# Altium PCB nixie_pcb.PcbDoc
Units mm, origin at the board's own origin, x right, y up, seen from the top; angles counter-clockwise.
Board outline 85 x 41 mm, 2 copper layers (Top Layer, Bottom Layer); 50 components, 56 nets, 228 pads, 25 vias.
Unrouted connection lines stored in the file: 1.
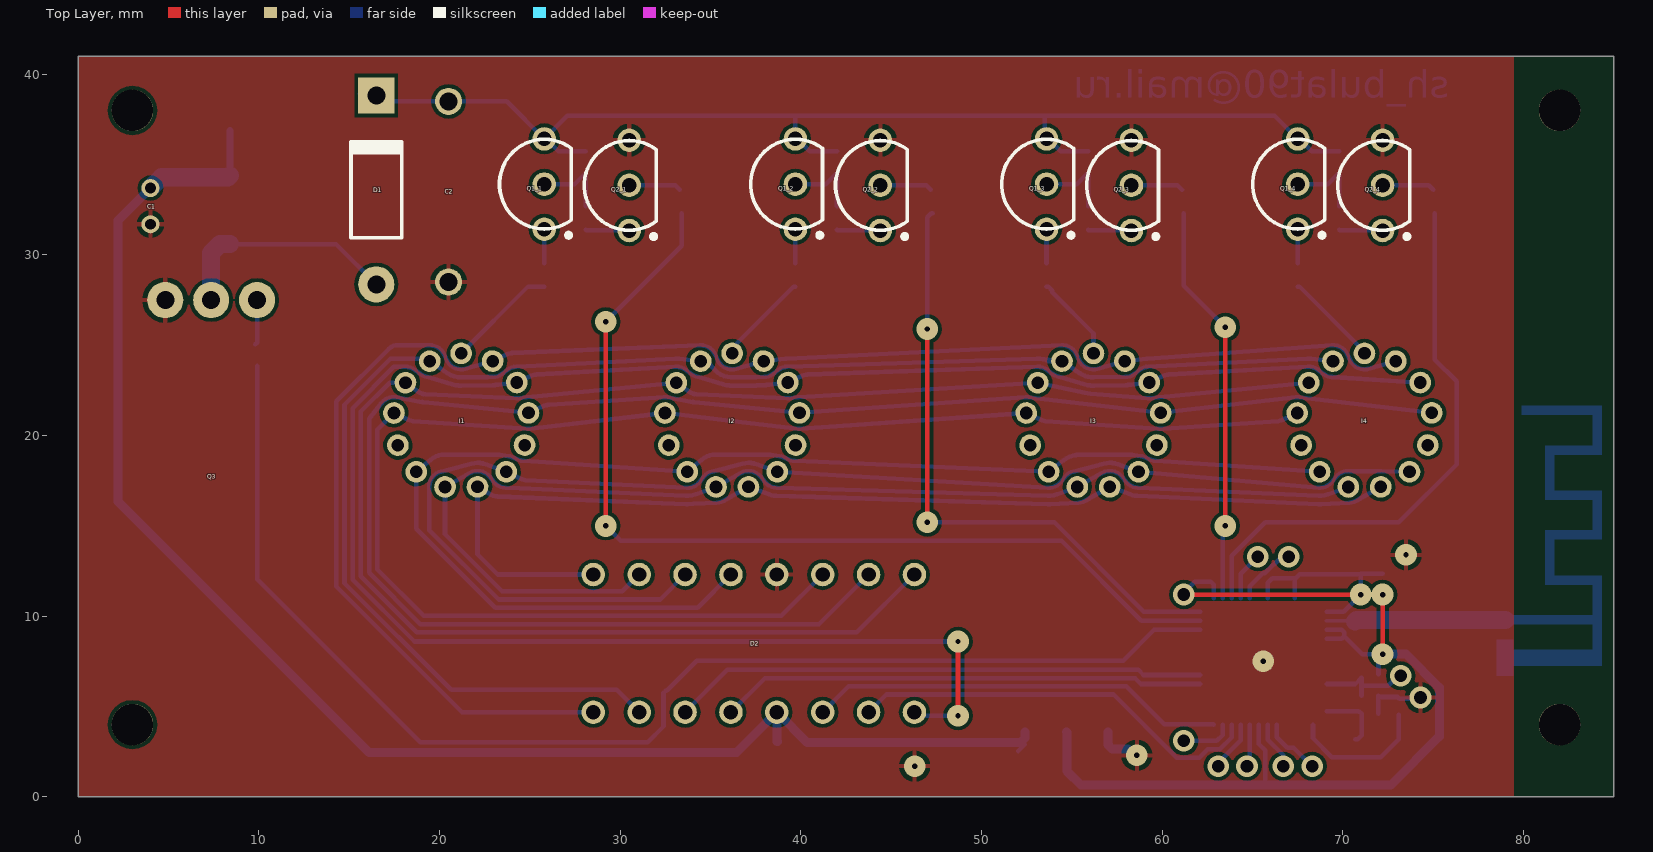
[diagram p0: Top Layer view]
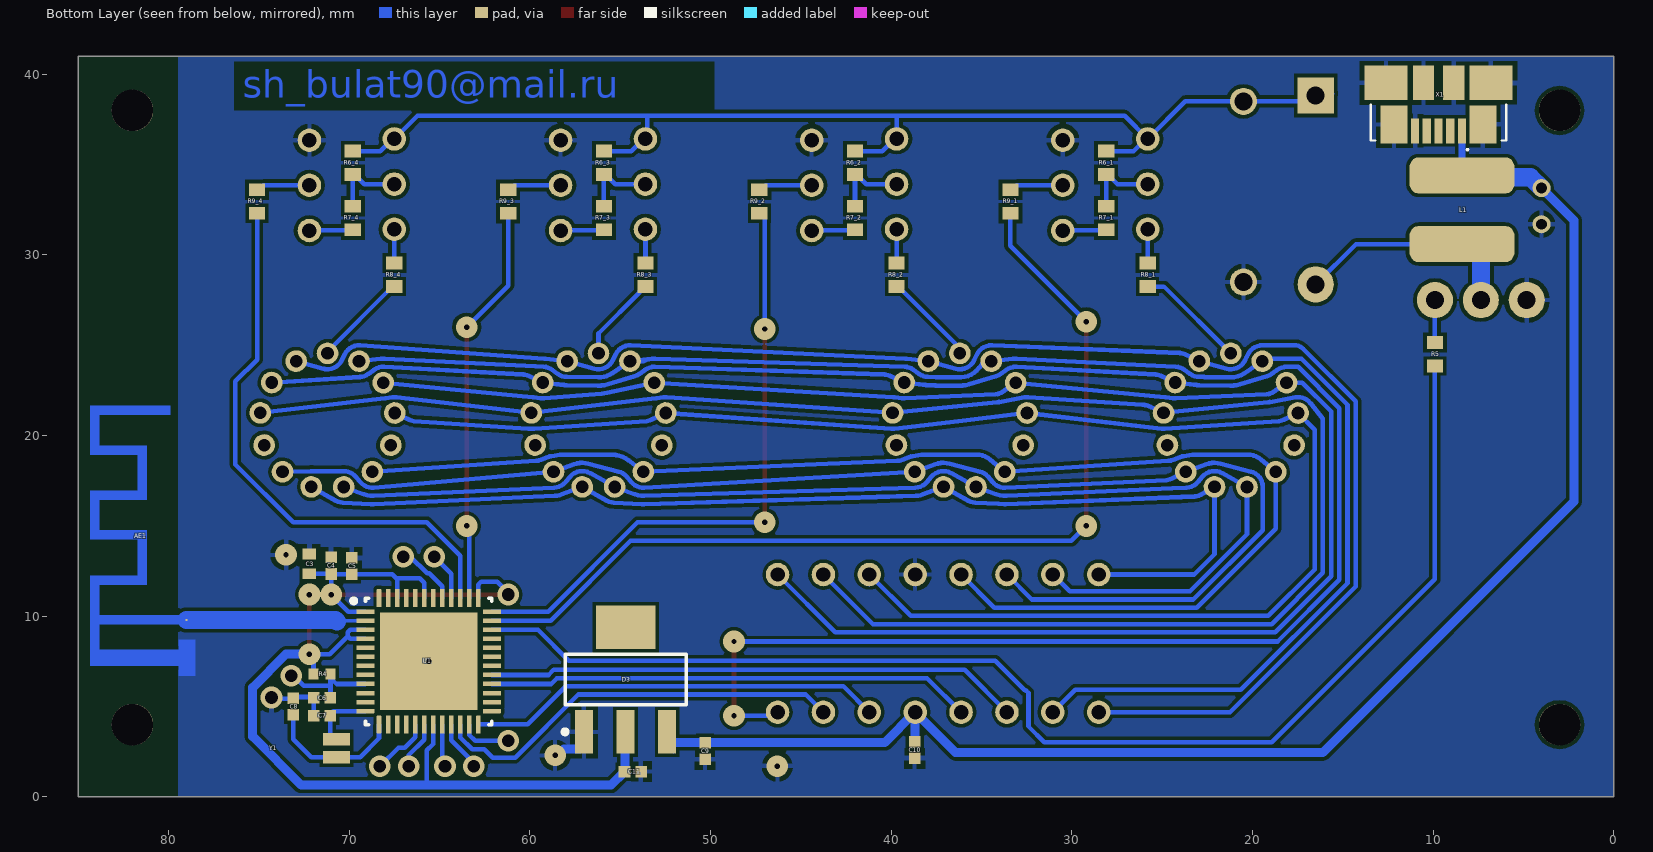
[diagram p1: Bottom Layer view, seen from below]

## Layer stack, top to bottom
Top Solder: solder mask 0.0102, Solder Resist, Dk 3.5
Top Layer: signal copper 0.0356
Dielectric 1: dielectric 0.32, FR-4, Dk 4.8
Bottom Layer: signal copper 0.0356
Bottom Solder: solder mask 0.0102, Solder Resist, Dk 3.5

## Board outline
0,0 85,0 85,41 0,41

## Design rules (kind name [scope] priority, off if disabled: settings)
Clearance [All] p1: gap=0.2 ignorepadtopadclearanceinfootprint=FALSE except(0: Arc-Hole Track-Hole SMDPad-Hole THPad-Hole Via-Hole Fill-Hole Poly-Hole Region-Hole Text-Hole; 0.15: Arc-THPad Track-THPad)
Height [All] p1: minheight=0 maxheight=40 prefheight=12.7
PolygonConnect PolygonConnect_1 [isvia] p1 off: connectstyle=Direct reliefconductorwidth=0.254 reliefentries=4 polygonreliefangle="90 Angle" airgapwidth=0.254
PolygonConnect [All] p2: connectstyle=Relief reliefconductorwidth=0.254 reliefentries=4 polygonreliefangle="90 Angle" airgapwidth=0.254
RoomDefinition HSSW4 [InComponentClass('HSSW4')] p1: confinementstyle=ConfineIn formatcopy=TRUE lockcomponents=FALSE outline 64.6,27 76.5,27 76.5,37.5 64.6,37.5
RoomDefinition HSSW3 [InComponentClass('HSSW3')] p2: confinementstyle=ConfineIn formatcopy=TRUE lockcomponents=FALSE outline 50.7,27 62.6,27 62.6,37.5 50.7,37.5
RoomDefinition HSSW2 [InComponentClass('HSSW2')] p3: confinementstyle=ConfineIn formatcopy=TRUE lockcomponents=FALSE outline 36.8,27 48.7,27 48.7,37.5 36.8,37.5
RoomDefinition HSSW1 [InComponentClass('HSSW1')] p4: confinementstyle=ConfineIn formatcopy=TRUE lockcomponents=FALSE outline 22.9,27 34.8,27 34.8,37.5 22.9,37.5
RoutingVias [All] p1: holewidth=0.711 width=1.27 viastyle="Through Hole" minholewidth=0.5 minwidth=1 maxholewidth=0.711 maxwidth=1.27
ShortCircuit [InComponent('AE1') vs IsFill] p1: allowed=TRUE
SolderMaskExpansion [All] p1: expansion=0.102 istentingtop=FALSE
Width [All] p1: maxlimit=1 minlimit=0.2 preferedwidth=0.254
28 further rules are at their usual default settings.

## Classes and differential pairs
net class A[1..4]: A1 A2 A3 A4
channel class high_side_switch: HSSW1 HSSW2 HSSW3 HSSW4
net class CTRL[1..4]: CTRL1 CTRL2 CTRL3 CTRL4
component class HSSW4: Q1_4 Q2_4 R6_4 R7_4 R8_4 R9_4
component class HSSW3: Q1_3 Q2_3 R6_3 R7_3 R8_3 R9_3
component class HSSW2: Q1_2 Q2_2 R6_2 R7_2 R8_2 R9_2
component class HSSW1: Q1_1 Q2_1 R6_1 R7_1 R8_1 R9_1
component class Designator: C1 C2 D1 L1 Q3 R5 X1

## Components (designator, comment, footprint, x,y, rotation, side; value= is the part's Value field where it differs from the comment)
AE1 "Antenna 2.4GHz" "Antenna 2.4Ghz" 78.95,7.25 r90 bottom
C1 "Cap Pol2" CAP_POL_5*11 4,32.7 r270 top value=100u
C2 "JFA02E104J" FILM_CAP_10 20.5,33.5 r90 top value=10nF
C3 "F980J476MMA" cap_tant_0603 72.2,12.9 r90 bottom value=47u
C4 "" "cap 0402" 71,12.8 r90 bottom value=10u
C5 "" "cap 0402" 69.851,12.779 r90 bottom value=0.1u
C6 "" "cap 0402" 71.5,5.5 r0 bottom value=0.1u
C7 "" "cap 0402" 71.5,4.5 r0 bottom value=10u
C8 "" "cap 0402" 73.1,5 r90 bottom value=10u
C9 "" "cap 0402" 50.3,2.54 r270 bottom value=0.1u
C10 "" "cap 0402" 38.7,2.6 r270 bottom value=0.1u
C11 "" "cap 0402" 54.3,1.4 r180 bottom value=0.1u
D1 "HER104" DO-204AL 16.5,33.6 r90 top
D2 "K155ID1" DIP16 37.4,8.5 r0 top
D3 "LD1117S33TR" SOT223_N 54.7,6.5 r90 bottom
I1 "IN-16" IN-16 21.2,20.8 r0 top
I2 "IN-16" IN-16 36.2,20.8 r0 top
I3 "IN-16" IN-16 56.2,20.8 r0 top
I4 "IN-16" IN-16 71.2,20.8 r0 top
L1 "Inductor" SDR0604 8.4,32.5 r180 bottom value=100u
Q1_1 "MPSA92" "TO-92 bent leads" 25.8,33.92 r0 top (schematic designator Q1)
Q1_2 "MPSA92" "TO-92 bent leads" 39.7,33.92 r0 top (schematic designator Q1)
Q1_3 "MPSA92" "TO-92 bent leads" 53.6,33.92 r0 top (schematic designator Q1)
Q1_4 "MPSA92" "TO-92 bent leads" 67.5,33.92 r0 top (schematic designator Q1)
Q2_1 "MPSA42" "TO-92 bent leads" 30.5,33.85 r0 top (schematic designator Q2)
Q2_2 "MPSA42" "TO-92 bent leads" 44.4,33.85 r0 top (schematic designator Q2)
Q2_3 "MPSA42" "TO-92 bent leads" 58.3,33.85 r0 top (schematic designator Q2)
Q2_4 "MPSA42" "TO-92 bent leads" 72.2,33.85 r0 top (schematic designator Q2)
Q3 "IRL640" TO220_LYING 7.36,27.5 r180 top
R4 "" "res 0402" 71.5,6.8 r180 bottom value=10k
R5 "Res2" 0402_res 9.9,24.5 r90 bottom value=100
R6_1 "Res2" 0402_res 28.1,35.1 r90 bottom value=10k (schematic designator R6)
R6_2 "Res2" 0402_res 42,35.1 r90 bottom value=10k (schematic designator R6)
R6_3 "Res2" 0402_res 55.9,35.1 r90 bottom value=10k (schematic designator R6)
R6_4 "Res2" 0402_res 69.8,35.1 r90 bottom value=10k (schematic designator R6)
R7_1 "Res2" 0402_res 28.1,32.05 r90 bottom value=10K (schematic designator R7)
R7_2 "Res2" 0402_res 42,32.05 r90 bottom value=10K (schematic designator R7)
R7_3 "Res2" 0402_res 55.9,32.05 r90 bottom value=10K (schematic designator R7)
R7_4 "Res2" 0402_res 69.8,32.05 r90 bottom value=10K (schematic designator R7)
R8_1 "Res2" 0402_res 25.8,28.9 r90 bottom value=10K (schematic designator R8)
R8_2 "Res2" 0402_res 39.7,28.9 r90 bottom value=10K (schematic designator R8)
R8_3 "Res2" 0402_res 53.6,28.9 r90 bottom value=10K (schematic designator R8)
R8_4 "Res2" 0402_res 67.5,28.9 r90 bottom value=10K (schematic designator R8)
R9_1 "Res2" 0402_res 33.4,32.95 r270 bottom value=10K (schematic designator R9)
R9_2 "Res2" 0402_res 47.3,32.95 r270 bottom value=10K (schematic designator R9)
R9_3 "Res2" 0402_res 61.2,32.95 r270 bottom value=10K (schematic designator R9)
R9_4 "Res2" 0402_res 75.1,32.95 r270 bottom value=10K (schematic designator R9)
U1 "ESP32-PICO-D4" ESP32-PICO-D4_Round_corner_pads 65.6,7.5 r180 bottom
X1 "47346-0001" MOLEX_47346-0001 9.7,38.2 r0 bottom
Y1 "XTAL" 32.768khz_quartz 70.7,2.7 r90 bottom

## Footprints (in the part's own frame and the unit in brackets; to place one, negate y for a bottom-side part, rotate by r counter-clockwise, add the part's x,y. Pads: shape width x height; smd on the part's side, far side on the other; paste and mask are expansions set on the pad)
32.768khz_quartz [mm]
  rect 0.7x1.5 smd: 1(-0.5,0) 2(0.5,0)
  body extent -0.99,2 1,8, height 2
0402_res [mm]
  rect 0.7x0.9 smd: 1(-0.65,0) 2(0.65,0)
  body extent -0.5,-0.25 0.5,0.25, height 0.4
"Antenna 2.4Ghz" [mm]
  rect 0.1x0.1 smd paste+0: 1(2.55,0.05)
  Top Layer region: 0,0 0,5.39 5,5.39 5,2.75 7,2.75 7,5.39 9.7,5.39 9.7,2.75 11.7,2.75 11.7,5.39 14.4,5.39 14.4,0.95 13.9,0.95 13.9,4.89 12.2,4.89 12.2,2.25 9.2,2.25 9.2,4.89 7.5,4.89 7.5,2.25 4.5,2.25 4.5,4.89 2.8,4.89 2.8,0 2.3,0 2.3,4.89 0.9,4.89 0.9,0
"cap 0402" [mm] "Chip Capacitor, 2-Leads, Body 1.00x0.50mm, IPC Medium Density"
  rect 0.64x0.64 smd: 1(-0.46,0) 2(0.46,0)
  body extent -0.55,-0.3 0.55,0.3, height 0.6
CAP_POL_5*11 [mm]
  round 1 hole 0.6: 1(-1,0) 2(1,0)
  body extent -2.5,-2.5 2.5,2.5, height 11
cap_tant_0603 [mm] "cap_0603"
  rect 0.6x0.75 smd: 1(-0.55,0) 2(0.55,0)
  body extent -0.8,-0.43 0.8,0.42, height 0.8
DIP16 [mm]
  round 1.3 hole 0.8: 1(-8.89,-3.81) 2(-6.35,-3.81) 3(-3.81,-3.81) 4(-1.27,-3.81) 5(1.27,-3.81) 6(3.81,-3.81) 7(6.35,-3.81) 8(8.89,-3.81) 9(8.89,3.81) 10(6.35,3.81) 11(3.81,3.81) 12(1.27,3.81) 13(-1.27,3.81) 14(-3.81,3.81) 15(-6.35,3.81) 16(-8.89,3.81)
  body extent -9.98,-3.94 9.98,3.94, height 4.7
DO-204AL [mm] "Diode, Axial; Body 5.2 x 2.7 mm (LxDia. max), Lead Dia. 0.86 mm (max)"
  round 2 hole 1: 1(-5.23,0)
  rect 2x2 hole 1: 2(5.23,0)
  silkscreen extent -2.65,-1.4 2.75,1.4
ESP32-PICO-D4_Round_corner_pads [mm]
  rrect25% 1x0.25 smd: 1(-3.5,2.75) 12(-3.5,-2.75) 25(3.5,-2.75) 36(3.5,2.75)
  rect 1x0.25 smd: 2(-3.5,2.25) 3(-3.5,1.75) 4(-3.5,1.25) 5(-3.5,0.75) 6(-3.5,0.25) 7(-3.5,-0.25) 8(-3.5,-0.75) 9(-3.5,-1.25) 10(-3.5,-1.75) 11(-3.5,-2.25) 26(3.5,-2.25) 27(3.5,-1.75) 28(3.5,-1.25) 29(3.5,-0.75) 30(3.5,-0.25) 31(3.5,0.25) 32(3.5,0.75) 33(3.5,1.25) 34(3.5,1.75) 35(3.5,2.25)
  rrect25% 0.25x1 smd: 13(-2.75,-3.5) 24(2.75,-3.5) 37(2.75,3.5) 48(-2.75,3.5)
  rect 0.25x1 smd: 14(-2.25,-3.5) 15(-1.75,-3.5) 16(-1.25,-3.5) 17(-0.75,-3.5) 18(-0.25,-3.5) 19(0.25,-3.5) 20(0.75,-3.5) 21(1.25,-3.5) 22(1.75,-3.5) 23(2.25,-3.5) 38(2.25,3.5) 39(1.75,3.5) 40(1.25,3.5) 41(0.75,3.5) 42(0.25,3.5) 43(-0.25,3.5) 44(-0.75,3.5) 45(-1.25,3.5) 46(-1.75,3.5) 47(-2.25,3.5)
  rect 5.4x5.4 smd paste-10: 49(0,0)
  silkscreen extent -4.28,-3.5 3.5,3.5, body extent -3.5,-3.5 3.5,3.5, height 1
FILM_CAP_10 [mm]
  round 1.5 hole 1: 1(-5,0) 2(5,0)
IN-16 [mm]
  round 1.2 hole 0.7: 1(0,3.75) 2(-1.743,3.32) 3(-3.087,2.129) 4(-3.723,0.451) 5(-3.506,-1.332) 6(-2.485,-2.809) 7(-0.894,-3.642) 8(0.901,-3.64) 9(2.49,-2.804) 10(3.508,-1.326) 11(3.722,0.457) 12(3.083,2.135) 13(1.737,3.323)
  body extent -3.75,-3.75 3.75,3.75, height 40
MOLEX_47346-0001 [mm]
  rect 0.45x1.38 smd: 1(-1.3,1.33) 2(-0.65,1.33) 3(0,1.33) 4(0.65,1.33) 5(1.3,1.33)
  rect 2.375x1.9 smd: 5(-2.913,-1.33) 5(2.913,-1.33)
  rect 1.475x2.1 smd: 5(-2.462,0.97) 5(2.462,0.97)
  rect 1.175x1.9 smd: 5(-0.837,-1.33) 5(0.837,-1.33)
  silkscreen extent -3.75,-0.13 3.75,2.42, body extent -3.99,-3.86 3.99,1.57, height 2.71
"res 0402" [mm] "Chip Resistor, 2-Leads, Body 1.05x0.54mm, IPC Medium Density"
  rect 0.55x0.6 smd: 1(-0.475,0) 2(0.475,0)
  body extent -0.55,-0.3 0.55,0.3, height 0.4
SDR0604 [mm]
  rrect50% 5.8x2 smd: 1(0,1.9) 2(0,-1.9)
SOT223_N [mm] "SOT223, 4-Leads, Body 6.5x3.5mm, Pitch 2.3mm, Lead Span 7mm, IPC Medium Density"
  rect 2.4x1 smd: 1(-2.9,2.3) 2(-2.9,0) 3(-2.9,-2.3)
  rect 2.4x3.3 smd: 4(2.9,0)
  silkscreen extent -3.02,-3.35 1.4,3.48, body extent -1.85,-3.35 1.85,3.35, height 1.7
TO220_LYING [mm]
  round 2 hole 1: 1(-2.54,0) 2(0,0) 3(2.54,0)
"TO-92 bent leads" [mm] "TO, Flat Index; 3 In-Line, Axial Leads; Body Dia. 4.5mm; Leads 0.51 x 0.48 mm (max)"
  round 1.3 hole 0.8: 1(0,-2.5) 2(0,0) 3(0,2.5)
  silkscreen extent -2.48,-2.95 1.5,2.48, body extent -2.48,-2.5 1.5,2.5, height 6.86

## Part data
C1: "Polarized Capacitor (Axial)", Voltage=16V, LatestRevisionDate=17-Jul-2002, LatestRevisionNote="Re-released for DXP Platform.", PackageDescription="Polarized Capacitor; 2 Leads", PackageReference=POLAR0.8, Published=8-Jun-2000, Publisher="Altium Limited"
C2: library part Cap, "Capacitor", LatestRevisionDate=17-Jul-2002, LatestRevisionNote="Re-released for DXP Platform.", PackageDescription="Radial Cap, Thru-Hole; 2 Leads; 0.3 in Pin Spacing", PackageReference=RAD-0.3, Published=8-Jun-2000, Publisher="Altium Limited"
C3: library part cap_tant, "CAP TANT 47UF 20% 6.3V 0603", P/N=F980J476MMA
C4 C7 C8: library part cap_small, "CAP CER 10UF 6.3V X5R 0402", P/N=GRJ155R60J106ME11D
C5 C6 C9 C10 C11: library part cap_small, "CAP CER 0.1UF 10V X5R 0402", P/N=CL05A104MP5NNNC
D1: library part Diode, "Default Diode", Code_JEDEC=DO-214-AB, LatestRevisionDate=17-Jul-2002, LatestRevisionNote="Re-released for DXP Platform.", PackageDescription="DO-214-AB/SMC; 2 C-Bend Leads; Body 7.9 x 5.9 mm, inc. leads (LxW)", PackageReference=SMC, PackageVersion=Sep-1996, Published=8-Jun-2000, Publisher="Altium Limited"
Q1_1 Q1_2 Q1_3 Q1_4: library part PNP, "PNP Bipolar Transistor", LatestRevisionDate=29-May-2009, LatestRevisionNote="IPC-7351 Footprint Added.", PackageDescription="3-Pin SOT-23 Package 0.95 mm Pitch, 2.4 mm Lead Span", PackageReference=SOT-23B, PackageVersion=Aug-1999, Published=8-Jun-2000, Publisher="Altium Limited"
Q2_1 Q2_2 Q2_3 Q2_4: library part NPN, "NPN Bipolar Transistor", Code_JEDEC=TO-226-AA, LatestRevisionDate=17-Jul-2002, LatestRevisionNote="Re-released for DXP Platform.", PackageDescription="TO, Flat Index; 3 In-Line, Axial Leads; Body Dia. 4.8mm; Leads 0.55 x 0.51 mm (max)", PackageReference=TO-226-AA, Published=8-Jun-2000, Publisher="Altium Limited"
Q3: library part MOSFET-N, "N-Channel MOSFET", LatestRevisionDate=17-Jul-2002, LatestRevisionNote="Re-released for DXP Platform.", PackageDescription="TO, Flat Index; 3 In-Line, Axial Leads; Body Dia. 4.6mm; Lead Dia. 0.5 mm (max)", PackageReference=E3, PackageVersion=1995/1996, Published=8-Jun-2000, Publisher="Altium Limited"
R4: library part res_small, "RES SMD 10K OHM 1% 1/16W 0402", P/N=RC0402FR-0710KL
R5 R6_1 R6_2 R6_3 R6_4 R7_1 R7_2 R7_3 R7_4 R8_1 R8_2 R8_3 R8_4 R9_1 R9_2 R9_3 R9_4: "Resistor", LatestRevisionDate=17-Jul-2002, LatestRevisionNote="Re-released for DXP Platform.", PackageDescription="Axial Device, Thru-Hole; 2 Leads; 0.4 in Pin Spacing", PackageReference=AXIAL-0.4, Published=8-Jun-2000, Publisher="Altium Limited"
U1: "ESP32 WIFI BLUETOOTH", P/N=ESP32-PICO-D4
X1: library part micro_usb
Y1: "Crystal Oscillator", LatestRevisionDate=17-Jul-2002, LatestRevisionNote="Re-released for DXP Platform.", PackageDescription="Crystal, Thru-Hole; 2 Leads; Body 3.1 x 8.2 mm (Dia.xH)", PackageReference=R38, Published=8-Jun-2000, Publisher="Altium Limited"
L1: Code_IEC=1005, Code_JEITA=0402, LatestRevisionDate=29-May-2009, LatestRevisionNote="IPC-7351 Footprint Added.", PackageDescription="Chip Inductor", PackageReference=0402-A, Published=8-Jun-2000, Publisher="Altium Limited"

## Free pads (board coordinates)
  round 2.3 hole 2.3 unplated: 0(3,38) 1(3,4) 1(82,4) 1(82,38)

## Via types
v1: diameter 1.2, hole 0.3, Top Layer to Bottom Layer, tented both sides, 15 vias
v2: diameter 1.2, hole 0.7, Top Layer to Bottom Layer, 10 vias

## Nets (pads, with @x,y where several pads share a name; then routed paths per layer and width w, separated by ;. In a path a pad name is that pad's centre, name@x,y a point inside that pad or via, vN(x,y) a via of type N, cw(c..) or ccw(c..) an arc to the next point about the centre after c; other vN are vias at no path point)
3V3: C3.1 C4.1 C5.1 C11.1 D3.2 D3.4 R4.1 U1.1 U1.3 U1.4 U1.19 U1.37 U1.43 U1.46 | length 69
  Top Layer w0.254: v2(61.2,11.2) v1(71,11.2) ; v1(72.2,7.9) v1(72.2,11.2)
  Bottom Layer w0.254: v2(61.2,11.2) 61.2,11.3 61.8,11.9 62.701,11.9 62.85,11.751 U1.37 ; U1.19 65.35,2.931 65.7,2.581 65.7,0.65 ; U1.43 65.85,11.85 66.1,12.1 67.3,12.1 67.35,12.05 ; U1.46 67.35,12.05 ; U1.4 69.938,8.75 70.087,8.899 ; U1.3 69.95,9.25 70.087,9.113 70.087,8.899 ; U1.1 70.05,10.25 v1(71,11.2) v1(72.2,11.2) ; v1@71,11.3 C4.1 ; R4.1 v1@71.975,7.775 ; v1@72.1,7.9 71.086,7.9 70.087,8.899 ; C3.1 72.195,12.345 71.005,12.345 C4.1 ; 67.35,12.05 67.619,12.319 C5.1 69.862,12.329 70.989,12.329 C4.1
  Bottom Layer w0.5: D3.2 54.73,3.57 54.73,1.43 C11.1 55.51,0.65 65.3,0.65 65.7,0.65 72.65,0.65 75.35,3.35 75.35,6.05 73.5,7.9 v1(72.2,7.9)
5V0: C1.1 C9.1 C10.1 D2.5 D3.3 L1.1 X1.1 | length 85.4
  Bottom Layer w0.254: D3.3@52.04,2.54 D3.3@52.4,2.9
  Bottom Layer w0.4: L1.1 X1.1
  Bottom Layer w0.5: C1.1 2.2,31.9 2.2,16.358 16.112,2.446 36.426,2.446 D2.5 D2.5@38.685,4.675 ; C10.1 38.685,3.075 D2.5@38.685,4.675 ; D3.3 52.4,3.25 52.15,3 C9.1 40.36,3 D2.5@38.685,4.675
  Bottom Layer w1: C1.1 4.6,34.3 8.3,34.3 L1.1
A1: I1.1 R8_1.1 | length 6.1
  Bottom Layer w0.254: I1.1 24.9,28.25 R8_1.1
A2: I2.1 R8_2.1 | length 5.2
  Bottom Layer w0.254: I2.1 36.381,24.731 36.381,25.031 39.6,28.25 R8_2.1
A3: I3.1 R8_3.1 | length 4.8
  Bottom Layer w0.254: R8_3.1 53.7,28.25 53.923,28.027 53.923,27.927 56.2,25.65 I3.1
A4: I4.1 R8_4.1 | length 5.3
  Bottom Layer w0.254: R8_4.1 67.6,28.25 71.2,24.65 I4.1
AD0: D2.3 U1.29 | length 29.6
  Bottom Layer w0.254: D2.3 35.929,7.029 58.688,7.029 58.967,6.75 U1.29
AD1: D2.6 U1.24 | length 23.1
  Bottom Layer w0.254: D2.6 42.641,6.121 58.021,6.121 60.115,4.027 62.823,4.027 U1.24
AD2: D2.7 U1.22 | length 23.1
  Bottom Layer w0.254: D2.7 44.727,5.667 57.322,5.667 60.816,2.173 62.062,2.173 62.516,2.627 63.188,2.627 63.848,3.287 63.848,3.998 U1.22
AD3: D2.4 U1.28 | length 26.9
  Bottom Layer w0.254: D2.4 38.015,6.575 58.5,6.575 58.825,6.25 U1.28
CTRL1: R9_1.2 U1.35 | length 54.1
  Top Layer w0.254: v1(29.2,15) v1(29.2,26.3)
  Bottom Layer w0.254: v1(29.2,15) 30.027,14.173 54.427,14.173 58.85,9.75 U1.35 ; v1(29.2,26.3) 33.4,30.5 R9_1.2
CTRL2: R9_2.2 U1.36 | length 34.4
  Top Layer w0.254: v1(47,15.2) v1(47,25.9)
  Bottom Layer w0.254: v1(47,15.2) 54.042,15.2 58.992,10.25 U1.36 ; v1(47,25.9) 47,32.077 47.223,32.3 R9_2.2
CTRL3: R9_3.2 U1.38 | length 22.7
  Top Layer w0.254: v1(63.5,15) v1(63.5,26)
  Bottom Layer w0.254: R9_3.2 61.2,28.3 v1(63.5,26) v1@63.1,26 ; U1.38 63.35,14.85 v1(63.5,15)
CTRL4: R9_4.2 U1.39 | length 31.3
  Bottom Layer w0.254: U1.39 63.85,13.35 65.7,15.2 73.1,15.2 76.3,18.4 76.3,23 75.1,24.2 R9_4.2
ESP_BOOT: U1.23 | length 2.9
  Bottom Layer w0.254: v2(61.2,3.1) 63.019,3.1 63.348,3.429 63.348,3.998 U1.23
ESP_EN: C6.1 R4.2 U1.9 | length 5.5
  Bottom Layer w0.254: U1.9 70.7,6.25 71.025,6.575 71.025,6.6 71.032,6.592 71.032,6.1 ; C6.1@71.04,5.6 71.032,5.608 71.032,6.1 ; v2(73.2,6.7) 73.06,6.7 72.507,6.147 71.08,6.147 71.032,6.1
GND: C1.2 C2.1 C3.2 C4.2 C5.2 C6.2 C7.2 C8.2 C9.2 C10.2 C11.2 D2.12 D3.1 Q2_1.3 Q2_2.3 Q2_3.3 Q2_4.3 Q3.3 U1.49 X1.5 | length 6
  Bottom Layer w0.254: C7.2@71.96,4.6 71.96,5.6 72.03,5.53 73.03,5.53 C8.2 73.13,5.43 74.23,5.43 v2(74.3,5.5)
  Bottom Layer w0.5: D3.1 57,2.9 57.25,2.65 58.115,2.65 58.465,2.3 v1(58.6,2.3)
  other v1: 46.3,1.7 65.6,7.5 73.5,13.4
HV: C2.2 D1.2 Q1_1.3 Q1_2.3 Q1_3.3 Q1_4.3 R6_1.2 R6_2.2 R6_3.2 R6_4.2 | length 66.6
  Bottom Layer w0.254: D1.2@15.6,38.93 D1.2@16.07,39.4 ; D1.2 16.83,38.5 C2.2 23.72,38.5 Q1_1.3 ; R6_1.2 26.588,35.75 25.918,36.42 Q1_1.3 ; R6_2.2 40.488,35.75 39.818,36.42 Q1_2.3 39.7,37.7 ; R6_3.2 54.388,35.75 53.718,36.42 Q1_3.3 53.5,36.52 53.5,37.7 ; R6_4.2 68.288,35.75 67.618,36.42 Q1_4.3 66.22,37.7 53.5,37.7 ; Q1_1.3 27.08,37.7 39.7,37.7 ; 39.7,37.7 53.5,37.7
K0: D2.1 I1.13 I2.13 I3.13 I4.13 | length 90
  Bottom Layer w0.254: 19.458,24.997 18.723,25 ccw(c18.721,24.746) 18.721,25 17.675,25 ccw(c17.675,24.302) 17.182,24.796 14.284,21.898 14.284,11.648 21.242,4.69 D2.1 ; 19.459,24.997 cw(c19.457,24.12) 20.245,24.506 20.329,24.334 20.413,24.163 ccw(c21.2,24.55) 20.468,24.066 ccw(c21.2,24.55) 21.435,23.705 I1.13 23.732,24.504 cw(c24.039,23.866) 24.011,24.574 34.419,24.996 cw(c34.457,24.12) 34.457,24.997 cw(c34.457,24.12) 35.245,24.506 35.245,24.504 35.413,24.163 ccw(c36.2,24.55) 35.497,24.026 ccw(c36.2,24.55) 36.2,23.673 ccw(c36.2,24.55) 36.435,23.705 I2.13 39.134,24.257 cw(c39.283,22.935) 39.22,24.264 54.414,24.996 cw(c54.457,24.12) 54.419,24.996 cw(c54.457,24.12) 55.245,24.506 55.413,24.163 ccw(c56.2,24.55) 55.414,24.161 ccw(c56.2,24.55) 56.435,23.705 I3.13 59.134,24.257 cw(c59.283,22.935) 59.189,24.262 69.392,24.995 cw(c69.457,24.12) 69.418,24.996 cw(c69.457,24.12) 70.245,24.506 70.413,24.163 ccw(c71.2,24.55) 70.497,24.025 ccw(c71.2,24.55) 71.282,23.677 ccw(c71.2,24.55) 71.435,23.705 I4.13
K1: D2.2 I1.2 I2.2 I3.2 I4.2 | length 87.7
  Bottom Layer w0.254: D2.2 29.813,5.927 20.647,5.927 14.738,11.836 14.738,21.71 17.289,24.26 19.317,24.26 I1.2 20.456,23.447 ccw(c21.2,24.55) 21.2,23.219 ccw(c21.2,24.55) 21.221,23.219 21.517,23.224 22.672,23.242 22.951,23.246 ccw(c22.937,24.123) 23.456,23.416 23.765,23.642 cw(c24.283,22.935) 24.239,23.811 30.324,24.12 33.044,24.259 cw(c33.113,22.929) 33.113,24.26 cw(c33.113,22.929) 33.261,24.252 ; 33.262,24.252 I2.2 34.728,24.12 cw(c34.729,23.866) 34.95,23.991 ccw(c35.566,24.34) 35.022,23.887 35.133,23.753 ; 35.141,23.744 ccw(c36.2,24.55) 36.304,23.223 cw(c36.323,22.97) 36.325,23.224 37.492,23.224 ccw(c37.492,24.123) 37.537,23.225 37.982,23.247 ccw(c37.937,24.123) 38.456,23.416 38.765,23.642 cw(c39.283,22.935) 39.256,23.811 48.772,24.12 53.067,24.26 ; 68.261,24.252 ccw(c68.113,22.929) 68.045,24.259 68.044,24.259 59.688,23.836 ccw(c59.732,22.935) 59.679,23.836 59.235,23.81 59.233,23.81 ccw(c59.283,22.935) 58.765,23.642 58.457,23.417 cw(c57.937,24.123) 58.456,23.416 cw(c57.937,24.123) 57.951,23.246 56.221,23.219 cw(c56.2,24.55) 55.456,23.447 I3.2 ; 68.262,24.252 I4.2 ; 53.067,24.26 cw(c53.113,22.929) 53.262,24.252 ; 53.067,24.26 53.069,24.26 cw(c53.113,22.929) 53.261,24.252 ; 53.262,24.252 cw(c53.113,22.929) 53.661,24.143 ccw(c53.765,24.374) 53.765,24.12 I3.2 ; 53.262,24.252 I3.2
K2: D2.14 I1.9 I2.9 I3.9 I4.9 | length 75
  Bottom Layer w0.254: D2.14 32.209,10.929 23.271,10.929 19.437,14.763 19.437,17.037 cw(c20.306,17.158) 20.083,18.007 21.762,18.447 cw(c22.101,17.16) 22.561,18.409 I1.9 24.482,17.609 ccw(c24.793,18.245) 24.759,17.538 33.674,17.115 ccw(c33.715,17.991) 34.387,17.428 34.633,17.722 ; 34.634,17.722 cw(c35.305,17.158) 35.083,18.007 36.762,18.447 cw(c37.101,17.16) 37.561,18.409 ; 37.561,18.409 I2.9 53.664,17.116 ccw(c53.715,17.991) 54.387,17.428 54.633,17.722 ; 54.634,17.722 cw(c55.306,17.158) 55.085,18.007 56.762,18.447 cw(c57.101,17.16) 57.561,18.409 ; 57.561,18.409 I3.9 68.637,17.118 68.64,17.118 ccw(c68.715,17.991) 69.388,17.429 69.633,17.722 cw(c70.306,17.158) 70.307,18.035 72.099,18.037 cw(c72.101,17.16) 72.124,18.036 I4.9
K3: D2.11 I1.4 I2.4 I3.4 I4.4 | length 86.8
  Bottom Layer w0.254: D2.11@41.21,11.786 D2.11 38.921,10.021 19.121,10.021 16.554,12.588 16.554,20.327 I1.4 18.274,20.872 ccw(c18.578,21.511) 18.531,20.805 24.864,20.382 ccw(c24.922,21.257) 25.023,20.386 I2.4 32.916,21.199 36.278,20.803 39.82,20.386 ccw(c39.922,21.257) 39.983,20.382 I3.4 53.274,20.872 ccw(c53.578,21.511) 53.531,20.805 59.762,20.389 59.864,20.382 ccw(c59.922,21.257) 59.979,20.382 60.084,20.389 ; 60.031,20.387 cw(c60.063,20.135) 60.064,20.389 60.084,20.389 ; I4.4 66.681,20.872 cw(c66.377,21.511) 66.423,20.805 60.084,20.389
K4: D2.13 I1.6 I2.6 I3.6 I4.6 | length 74.3
  Bottom Layer w0.254: 23.334,18.934 ccw(c23.195,17.996) 23.195,18.945 20.264,18.945 ccw(c20.264,17.798) 19.523,18.674 I1.6 18.715,14.843 23.083,10.475 34.295,10.475 D2.13 ; 23.335,18.934 23.816,18.864 ; 23.816,18.864 cw(c23.69,17.996) 24.023,18.807 24.376,18.663 ccw(c24.708,19.474) 24.649,18.599 I2.6 34.523,18.673 cw(c35.264,17.798) 35.264,18.945 38.195,18.945 cw(c38.195,17.996) 38.334,18.934 ; 38.335,18.934 38.816,18.864 ; 38.816,18.864 cw(c38.69,17.996) 39.023,18.807 39.376,18.663 ccw(c39.708,19.474) 39.67,18.598 I3.6 54.536,18.631 cw(c55.432,17.48) 55.429,18.939 55.636,18.939 57.093,18.945 ; 57.093,18.945 cw(c57.101,17.16) 57.113,18.945 58.203,18.939 ; 58.204,18.939 cw(c58.201,17.996) 58.33,18.93 58.806,18.865 cw(c58.69,17.996) 59.023,18.807 59.376,18.663 ccw(c59.708,19.474) 59.649,18.599 I4.6
K5: D2.15 I1.7 I2.7 I3.7 I4.7 | length 67
  Bottom Layer w0.254: D2.15 30.123,11.383 23.459,11.383 20.306,14.537 I1.7 21.671,17.924 cw(c22.101,17.16) 22.773,17.723 22.774,17.722 23.019,17.431 ccw(c23.69,17.996) 23.65,17.12 24.442,17.083 33.605,16.664 33.655,16.662 ccw(c33.715,17.991) 33.8,16.663 ccw(c33.715,17.991) 34.175,16.742 ; 34.176,16.743 35.102,17.083 I2.7 35.313,17.162 ccw(c35.21,17.394) 35.334,17.172 36.67,17.924 cw(c37.101,17.16) 37.773,17.723 38.019,17.431 ccw(c38.69,17.996) 38.02,17.43 ccw(c38.69,17.996) 38.664,17.119 53.674,16.661 ccw(c53.715,17.991) 54.175,16.742 I3.7 55.313,17.162 ccw(c55.21,17.394) 55.334,17.172 56.67,17.924 cw(c57.101,17.16) 57.773,17.723 58.01,17.442 58.019,17.431 ccw(c58.69,17.996) 58.649,17.12 68.653,16.662 68.657,16.662 ccw(c68.715,17.991) 69.176,16.743 I4.7
K6: D2.16 I1.8 I2.8 I3.8 I4.8 | length 61.6
  Bottom Layer w0.254: D2.16 23.227,12.31 22.101,13.436 I1.8 22.87,16.724 ccw(c23.228,17.356) 23.198,16.63 23.93,16.6 33.663,16.201 ccw(c33.7,17.108) 33.746,16.201 34.058,16.217 35.35,16.282 ccw(c35.305,17.158) 35.735,16.393 I2.8 38.232,16.746 ccw(c38.69,17.996) 38.649,16.665 40.791,16.6 53.661,16.207 ccw(c53.715,17.991) 53.733,16.206 ccw(c53.715,17.991) 53.8,16.208 55.347,16.282 ccw(c55.306,17.158) 55.735,16.393 I3.8 58.232,16.746 ccw(c58.69,17.996) 58.628,16.666 68.634,16.208 ccw(c68.715,17.991) 68.8,16.208 70.347,16.282 ccw(c70.306,17.158) 70.735,16.393 I4.8
K7: D2.9 I1.3 I2.3 I3.3 I4.3 | length 96.2
  Bottom Layer w0.254: D2.9 43.093,9.113 18.745,9.113 15.646,12.212 15.646,21.334 17.242,22.929 I1.3 18.834,22.421 ccw(c19.242,23) 19.209,22.293 24.242,22.059 ccw(c24.283,22.935) 24.413,22.068 24.792,22.124 cw(c24.922,21.257) 24.838,22.13 I2.3 33.834,22.421 ccw(c34.242,23) 34.209,22.293 39.242,22.059 ccw(c39.283,22.935) 39.413,22.068 39.792,22.124 cw(c39.922,21.257) 39.871,22.133 I3.3 55.725,22.362 ccw(c56.2,24.55) 56.02,22.318 59.213,22.061 ccw(c59.283,22.935) 59.264,22.058 ; 59.269,22.058 ccw(c59.283,22.935) 59.413,22.068 ; I4.3 59.838,22.13 ccw(c59.922,21.257) 59.792,22.124 59.413,22.067 ; 59.264,22.058 cw(c59.265,21.804) 59.268,22.058 ; 59.264,22.058 ccw(c59.283,22.935) 59.268,22.058 ; 59.268,22.058 ccw(c59.283,22.935) 59.413,22.068
K8: D2.10 I1.11 I2.11 I3.11 I4.11 | length 98.5
  Bottom Layer w0.254: 17.637,22.113 ccw(c17.477,21.251) 17.477,22.128 ccw(c17.477,21.251) 16.791,21.796 16.1,20.929 16.1,12.4 18.933,9.567 41.007,9.567 D2.10 ; 17.637,22.113 19.033,21.857 ccw(c19.242,23) 19.125,21.844 I1.11 25.231,21.4 25.625,21.582 25.723,21.627 cw(c26.02,20.985) 25.866,21.676 cw(c26.125,20.515) 26.048,21.702 26.086,21.705 32.418,22.125 cw(c32.477,21.251) 32.477,22.128 cw(c32.477,21.251) 32.637,22.113 ; 32.637,22.113 34.033,21.857 ccw(c34.242,23) 34.125,21.844 I2.11 46.361,21.705 52.416,22.125 cw(c52.477,21.251) 52.608,22.118 ; 52.608,22.118 52.985,22.062 ccw(c53.113,22.929) 53.012,22.058 I3.11 67.374,22.121 cw(c67.477,21.251) 67.608,22.118 67.985,22.062 ccw(c68.113,22.929) 68.012,22.058 I4.11 ; 67.375,22.122 cw(c67.477,21.251) 67.608,22.118
K9: D2.8 I1.12 I2.12 I3.12 I4.12 | length 112.2
  Top Layer w0.254: v1(48.7,4.5) v1(48.7,8.6)
  Bottom Layer w0.254: 40.361,23.383 ccw(c40.384,22.675) 40.079,23.314 I2.12 38.673,22.866 38.086,22.801 cw(c37.937,24.123) 38.006,22.794 37.56,22.772 cw(c37.492,24.123) 37.497,22.77 36.207,22.765 cw(c36.2,24.55) 35.692,22.839 34.207,23.279 cw(c34.457,24.12) 33.94,23.412 33.632,23.637 ccw(c33.113,22.929) 33.113,23.806 ccw(c33.113,22.929) 33.064,23.805 25.348,23.382 25.345,23.382 ccw(c25.384,22.675) 25.078,23.314 25.077,23.313 I1.12 23.673,22.866 23.086,22.801 cw(c22.937,24.123) 22.96,22.792 21.227,22.765 cw(c21.2,24.55) 20.692,22.839 19.207,23.279 cw(c19.457,24.12) 18.94,23.412 18.685,23.598 18.632,23.637 ccw(c18.113,22.929) 18.113,23.806 17.477,23.806 15.192,21.522 15.192,12.024 18.616,8.6 v1(48.7,8.6) ; 40.362,23.383 53.084,23.806 cw(c53.113,22.929) 53.1,23.806 cw(c53.113,22.929) 53.632,23.637 53.94,23.412 ccw(c54.457,24.12) 54.207,23.279 55.692,22.839 ccw(c56.2,24.55) 56.227,22.765 57.96,22.792 ccw(c57.937,24.123) 58.086,22.801 I3.12 60.079,23.314 cw(c60.384,22.675) 60.345,23.382 60.365,23.383 68.063,23.805 ; D2.8 46.48,4.5 v1(48.7,4.5) ; 68.064,23.805 cw(c68.113,22.929) 68.632,23.637 68.94,23.412 ccw(c69.457,24.12) 69.401,23.245 I4.12
MTCK: U1.20 | length 2.4
  Bottom Layer w0.254: v2(64.7,1.7) 64.85,1.85 U1.20
MTDI: U1.18 | length 2.7
  Bottom Layer w0.254: U1.18 65.85,3.167 66.7,2.317 v2(66.7,1.7)
MTDO: U1.21 | length 2.8
  Bottom Layer w0.254: v2(63.1,1.7) 63.1,1.897 64.348,3.145 64.348,3.998 U1.21
MTMS: U1.17 | length 3.3
  Bottom Layer w0.254: U1.17 66.35,3.309 66.932,2.727 67.273,2.727 v2(68.3,1.7)
NetAE1_1: AE1.1 U1.2 | length 10
  Bottom Layer w0.2: U1.2 70.62,9.75 70.67,9.7
  Bottom Layer w1: 70.67,9.7 70.77,9.8 AE1.1
NetC7_1: C7.1 U1.12 Y1.2 | length 3.6
  Bottom Layer w0.254: U1.12 69.102,4.748 70.892,4.748 71.04,4.6 71.04,3.423 70.817,3.2 Y1.2
NetC8_1: C8.1 U1.13 Y1.1 | length 7.7
  Bottom Layer w0.254: U1.13 68.35,3.249 69.399,2.2 Y1.1 Y1.1@70.899,2.201 ; Y1.1@70.9,2.2 72.1,2.2 73.1,3.2 C8.1
NetD1_1: D1.1 L1.2 Q3.2 | length 12.9
  Bottom Layer w0.254: L1.2 14.27,30.6 D1.1
  Bottom Layer w1: Q3.2 7.36,30.1 7.86,30.6 L1.2
NetQ1_1_1: Q1_1.1 R8_1.2 | length 1.9
  Bottom Layer w0.254: R8_1.2 Q1_1.1
NetQ1_1_2: Q1_1.2 R6_1.1 R7_1.2 | length 4.3
  Bottom Layer w0.254: Q1_1.2 27.47,33.92 28,34.45 R6_1.1 R7_1.2
NetQ1_2_1: Q1_2.1 R8_2.2 | length 1.9
  Bottom Layer w0.254: R8_2.2 Q1_2.1
NetQ1_2_2: Q1_2.2 R6_2.1 R7_2.2 | length 4.3
  Bottom Layer w0.254: Q1_2.2 41.37,33.92 41.9,34.45 R6_2.1 R7_2.2
NetQ1_3_1: Q1_3.1 R8_3.2 | length 1.9
  Bottom Layer w0.254: R8_3.2 Q1_3.1
NetQ1_3_2: Q1_3.2 R6_3.1 R7_3.2 | length 4.3
  Bottom Layer w0.254: Q1_3.2 55.27,33.92 55.8,34.45 R6_3.1 R7_3.2
NetQ1_4_1: Q1_4.1 R8_4.2 | length 1.9
  Bottom Layer w0.254: R8_4.2 Q1_4.1
NetQ1_4_2: Q1_4.2 R6_4.1 R7_4.2 | length 4.3
  Bottom Layer w0.254: Q1_4.2 69.17,33.92 69.7,34.45 R6_4.1 R7_4.2
NetQ2_1_1: Q2_1.1 R7_1.1 | length 2.4
  Bottom Layer w0.254: R7_1.1 28.125,31.375 30.475,31.375 Q2_1.1
NetQ2_1_2: Q2_1.2 R9_1.1 | length 2.9
  Bottom Layer w0.254: Q2_1.2 33.05,33.85 R9_1.1@33.3,33.6
NetQ2_2_1: Q2_2.1 R7_2.1 | length 2.4
  Bottom Layer w0.254: R7_2.1 42.025,31.375 44.375,31.375 Q2_2.1
NetQ2_2_2: Q2_2.2 R9_2.1 | length 2.9
  Bottom Layer w0.254: Q2_2.2 46.95,33.85 R9_2.1@47.2,33.6
NetQ2_3_1: Q2_3.1 R7_3.1 | length 2.4
  Bottom Layer w0.254: R7_3.1 55.925,31.375 58.275,31.375 Q2_3.1
NetQ2_3_2: Q2_3.2 R9_3.1 | length 2.9
  Bottom Layer w0.254: Q2_3.2 60.85,33.85 R9_3.1@61.1,33.6
NetQ2_4_1: Q2_4.1 R7_4.1 | length 2.4
  Bottom Layer w0.254: R7_4.1 69.825,31.375 72.175,31.375 Q2_4.1
NetQ2_4_2: Q2_4.2 R9_4.1 | length 2.9
  Bottom Layer w0.254: Q2_4.2 74.75,33.85 R9_4.1@75,33.6
NetQ3_2: Q3.1 R5.2 | length 2.5
  Bottom Layer w0.254: R5.2@9.8,25.05 R5.2 Q3.1
NetR5_1: R5.1 U1.34 | length 71.4
  Bottom Layer w0.254: R5.1 9.9,12.058 18.935,3.023 31.523,3.023 32.4,3.9 32.4,5.751 32.549,5.9 32.6,5.9 34.246,7.546 57.846,7.546 59.55,9.25 U1.34
UART_RX: U1.40 | length 2.7
  Bottom Layer w0.254: U1.40 64.35,12.348 65.3,13.298 v2(65.3,13.3)
UART_TX: U1.41 | length 3.5
  Bottom Layer w0.254: U1.41 64.852,11.002 64.852,11.652 65.573,12.373 65.684,12.373 66.611,13.3 v2(67,13.3)
pads on no net: I1.5 I1.10 I2.5 I2.10 I3.5 I3.10 I4.5 I4.10 U1.5 U1.6 U1.7 U1.8 U1.10 U1.11 U1.14 U1.15 U1.16 U1.25 U1.26 U1.27 U1.30 U1.31 U1.32 U1.33 U1.42 U1.44 U1.45 U1.47 U1.48 X1.2 X1.3 X1.4

## Polygon pours and split planes (outlines as drawn)
GND on Top Layer "GND_L01_P001" (solid, pour order 1): 79.45,41 79.45,0 0,0 0,41
GND on Bottom Layer "GND_L02_P000" (solid, pour order 0): 0,0 0,41 79.45,41 79.45,0

## Other copper
Bottom Layer:
  rectangle net GND: 78.5,6.7 79.45,8.7
  text "sh_bulat90@mail.ru" at 75.9,38.708 h1.52

## Silkscreen, mask and mechanical layers (free items; w line width, h text height)
Mechanical 1:
  the board outline again, w0.1